# Altium PCB PCB1.PcbDoc
Units mil, origin at the board's own origin, x right, y up, seen from the top; angles counter-clockwise.
Board outline 6000 x 4000 mil, 2 copper layers (Top Layer, Bottom Layer); 74 components, 108 nets, 466 pads, 146 vias.
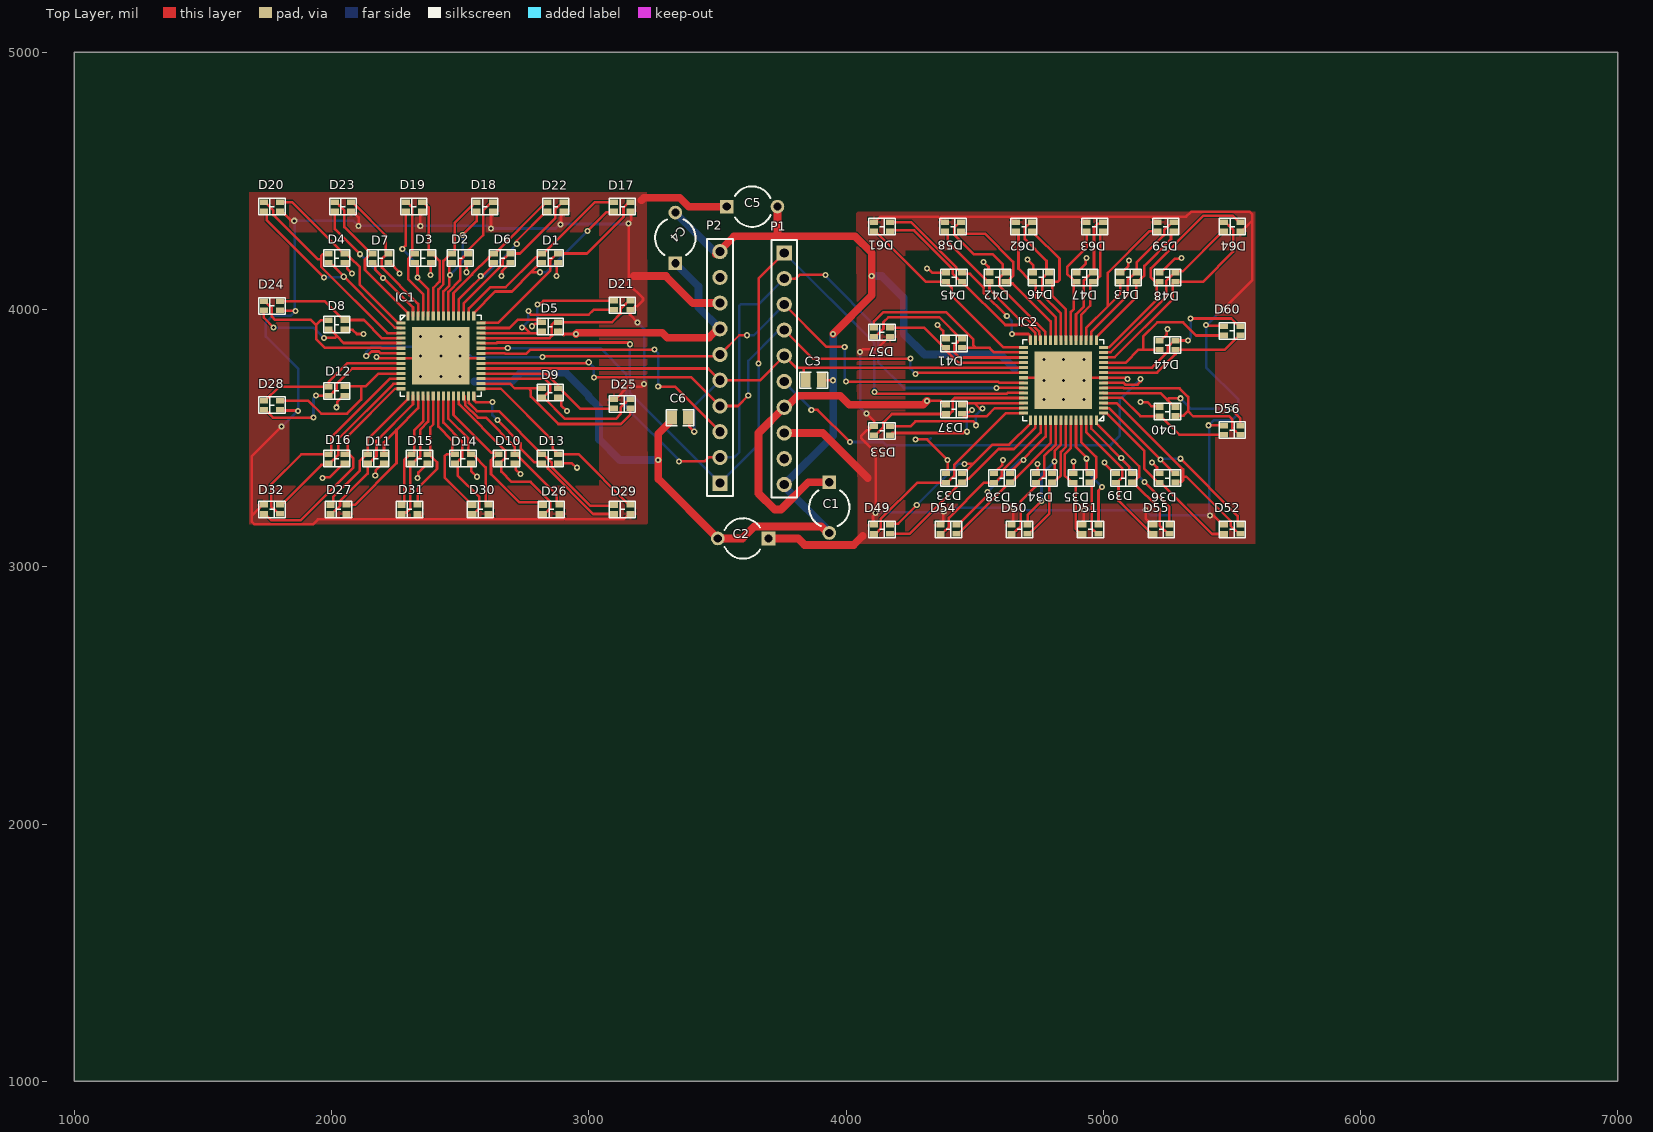
[diagram p0: Top Layer view]
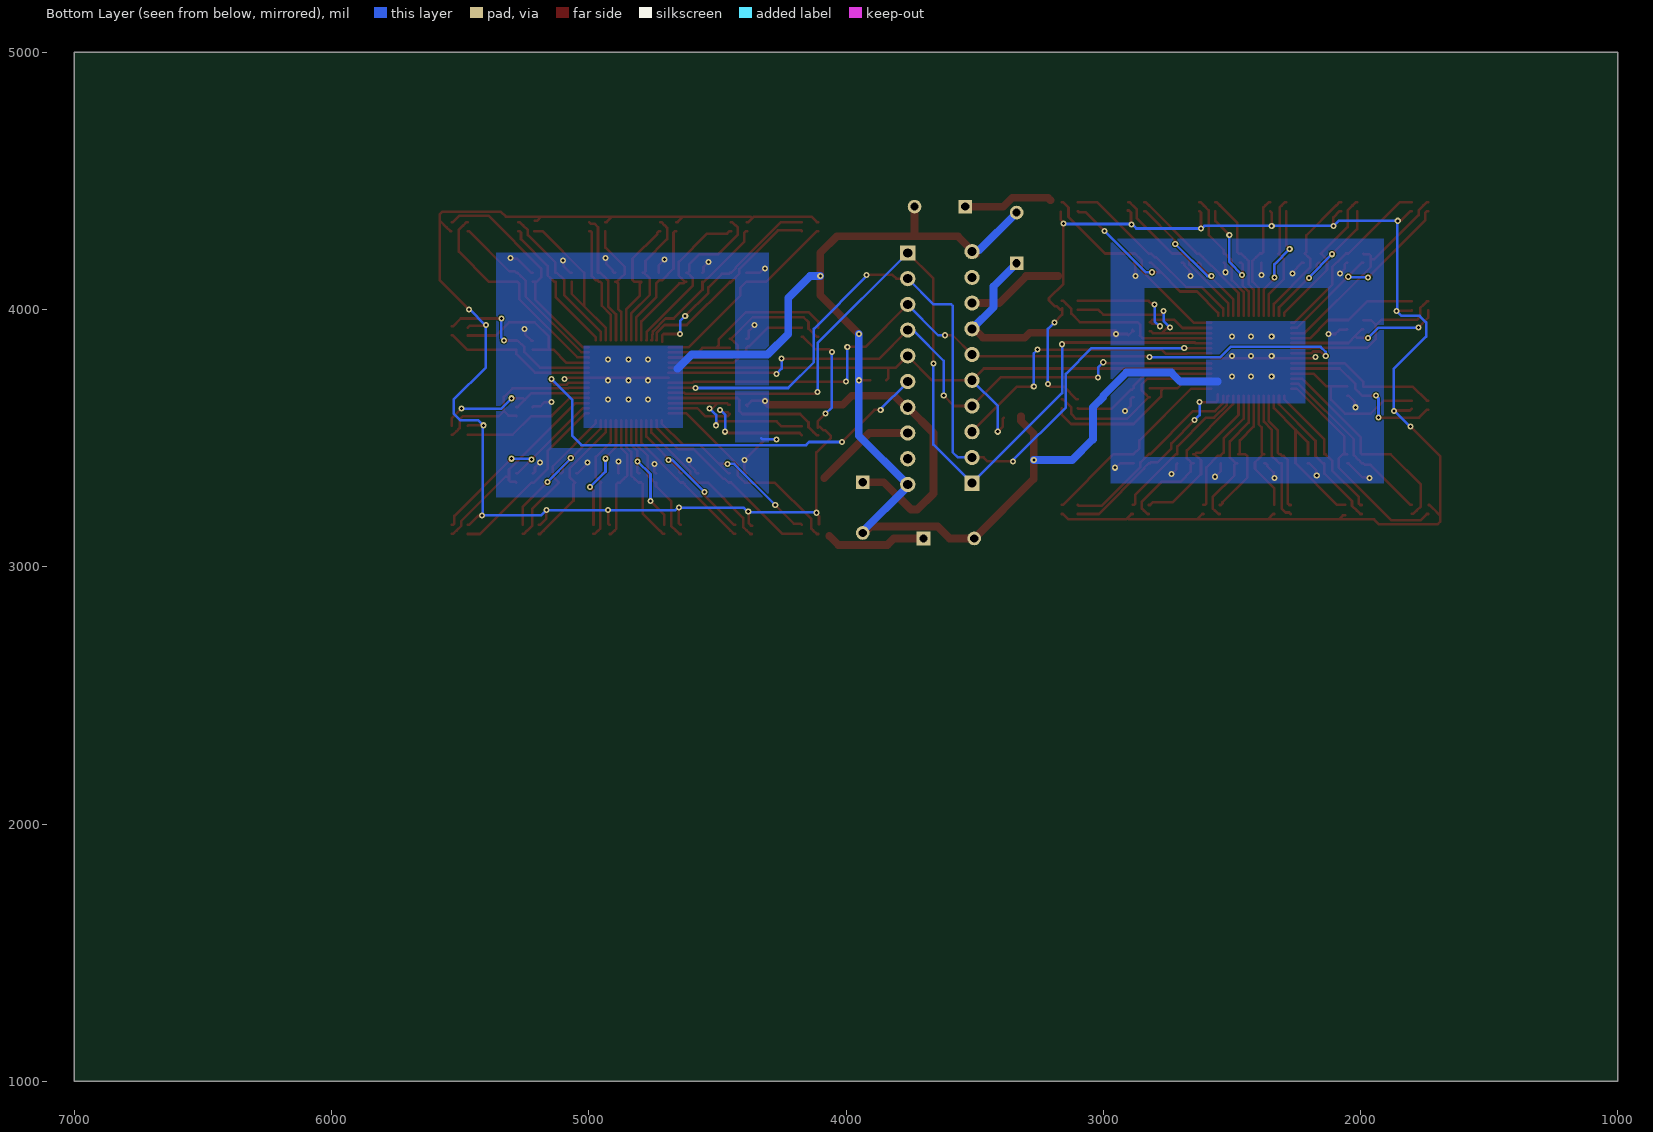
[diagram p1: Bottom Layer view, seen from below]

## Layer stack, top to bottom
Top Solder: solder mask 0.4, Solder Resist, Dk 3.5
Top Layer: signal copper 1.4
Dielectric 1: dielectric 12.6, FR-4, Dk 4.8
Bottom Layer: signal copper 1.4
Bottom Solder: solder mask 0.4, Solder Resist, Dk 3.5

## Board outline
1000,1000 7000,1000 7000,5000 1000,5000

## Design rules (kind name [scope] priority, off if disabled: settings)
Clearance [All] p1: gap=5 ignorepadtopadclearanceinfootprint=FALSE except(0: Arc-Text Track-Text SMDPad-Text THPad-Text Via-Text Fill-Text Poly-Text Region-Text Text-Text)
MinimumSolderMaskSliver [All] p1: minsoldermaskwidth=0
PolygonConnect [All] p1: thpad.connectstyle=Relief thpad.reliefconductorwidth=10 thpad.reliefentries=4 thpad.polygonreliefangle="90 Angle" thpad.airgapwidth=10 smdpad.connectstyle=Relief smdpad.reliefconductorwidth=10 smdpad.reliefentries=4 smdpad.polygonreliefangle="90 Angle" smdpad.airgapwidth=10 via.connectstyle=Direct via.reliefconductorwidth=10 via.reliefentries=4 via.polygonreliefangle="90 Angle" via.airgapwidth=10
RoutingVias [All] p1: holewidth=11.81 width=23.62 viastyle="Through Hole" minholewidth=11.81 minwidth=23.62 maxholewidth=11.81 maxwidth=23.62
SilkToSilkClearance [All] p1: silktosilkclearance=0
SilkToSolderMaskClearance [IsPad] p1: minsilkscreentomaskgap=0 clearancetoexposedcopper=TRUE
SolderMaskExpansion [All] p1: expansion=4
UnConnectedPin UnConnectedPin_1 [InNet('+VIN_2')] p1:
UnConnectedPin [InNet('+VIN_1')] p2:
Width [All] p1: maxlimit=50 minlimit=10 preferedwidth=10
27 further rules are at their usual default settings.

## Classes and differential pairs
component class Sheet1: C1 C3 D33 D34 D35 D36 D37 D38 D39 D40 D41 D42 D43 D44 D45 D46 D47 D48 D49 D50 D51 D52 D53 D54 D55 D56 D57 D58 D59 D60 D61 D62 D63 D64 IC2 P1
component class TLC5955: C6 D1 D2 D3 D4 D5 D6 D7 D8 D9 D10 D11 D12 D13 D14 D15 D16 D17 D18 D19 D20 D21 D22 D23 D24 D25 D26 D27 D28 D29 D30 D31 D32 IC1 P2

## Components (designator, comment, footprint, x,y, rotation, side; value= is the part's Value field where it differs from the comment)
C1 "Cap2" CAPR5-4X5 3935,3230 r270 top value=100pF
C2 "Cap2" CAPR5-4X5 3600,3110 r180 top value=100pF
C3 "0805 Capacitor" "0805 Capacitor" 3875,3725 r180 top
C4 "Cap2" CAPR5-4X5 3336.46,4278.54 r90 top value=100pF
C5 "Cap2" CAPR5-4X5 3635,4400 r0 top value=100pF
C6 "0805 Capacitor" "0805 Capacitor" 3355,3580 r0 top
D1 "RGB 0603 LED" "RGB LED" 2850,4200 r0 top
D2 "RGB 0603 LED" "RGB LED" 2500,4200 r0 top
D3 "RGB 0603 LED" "RGB LED" 2355,4200 r0 top
D4 "RGB 0603 LED" "RGB LED" 2020,4200 r0 top
D5 "RGB 0603 LED" "RGB LED" 2850,3933.33 r0 top
D6 "RGB 0603 LED" "RGB LED" 2663.5,4200 r0 top
D7 "RGB 0603 LED" "RGB LED" 2190,4200 r0 top
D8 "RGB 0603 LED" "RGB LED" 2020,3941.67 r0 top
D9 "RGB 0603 LED" "RGB LED" 2850,3676.67 r0 top
D10 "RGB 0603 LED" "RGB LED" 2680.6,3420 r0 top
D11 "RGB 0603 LED" "RGB LED" 2172.4,3420 r0 top
D12 "RGB 0603 LED" "RGB LED" 2020,3683.33 r0 top
D13 "RGB 0603 LED" "RGB LED" 2850,3420 r0 top
D14 "RGB 0603 LED" "RGB LED" 2511.2,3420 r0 top
D15 "RGB 0603 LED" "RGB LED" 2341.8,3420 r0 top
D16 "RGB 0603 LED" "RGB LED" 2020,3420 r0 top
D17 "RGB 0603 LED" "RGB LED" 3130,4400 r0 top
D18 "RGB 0603 LED" "RGB LED" 2595.6,4400 r0 top
D19 "RGB 0603 LED" "RGB LED" 2319.9,4400 r0 top
D20 "RGB 0603 LED" "RGB LED" 1768.5,4400 r0 top
D21 "RGB 0603 LED" "RGB LED" 3130,4016.67 r0 top
D22 "RGB 0603 LED" "RGB LED" 2871.3,4400 r0 top
D23 "RGB 0603 LED" "RGB LED" 2044.2,4400 r0 top
D24 "RGB 0603 LED" "RGB LED" 1768.5,4014.09 r0 top
D25 "RGB 0603 LED" "RGB LED" 3130,3633.33 r180 top
D26 "RGB 0603 LED" "RGB LED" 2854.3,3222.72 r0 top
D27 "RGB 0603 LED" "RGB LED" 2027.2,3222.72 r0 top
D28 "RGB 0603 LED" "RGB LED" 1768.5,3628.19 r0 top
D29 "RGB 0603 LED" "RGB LED" 3130,3222.72 r0 top
D30 "RGB 0603 LED" "RGB LED" 2578.6,3222.72 r0 top
D31 "RGB 0603 LED" "RGB LED" 2302.9,3222.72 r0 top
D32 "RGB 0603 LED" "RGB LED" 1768.5,3222.72 r180 top
D33 "RGB 0603 LED" "RGB LED" 4420,3345 r180 top
D34 "RGB 0603 LED" "RGB LED" 4770,3345 r180 top
D35 "RGB 0603 LED" "RGB LED" 4915,3345 r180 top
D36 "RGB 0603 LED" "RGB LED" 5250,3345 r180 top
D37 "RGB 0603 LED" "RGB LED" 4420,3611.67 r180 top
D38 "RGB 0603 LED" "RGB LED" 4606.5,3345 r180 top
D39 "RGB 0603 LED" "RGB LED" 5080,3345 r180 top
D40 "RGB 0603 LED" "RGB LED" 5250,3603.33 r180 top
D41 "RGB 0603 LED" "RGB LED" 4420,3868.33 r180 top
D42 "RGB 0603 LED" "RGB LED" 4589.4,4125 r180 top
D43 "RGB 0603 LED" "RGB LED" 5097.6,4125 r180 top
D44 "RGB 0603 LED" "RGB LED" 5250,3861.67 r180 top
D45 "RGB 0603 LED" "RGB LED" 4420,4125 r180 top
D46 "RGB 0603 LED" "RGB LED" 4758.8,4125 r180 top
D47 "RGB 0603 LED" "RGB LED" 4928.2,4125 r180 top
D48 "RGB 0603 LED" "RGB LED" 5250,4125 r180 top
D49 "RGB 0603 LED" "RGB LED" 4140,3145 r180 top
D50 "RGB 0603 LED" "RGB LED" 4674.4,3145 r180 top
D51 "RGB 0603 LED" "RGB LED" 4950.1,3145 r180 top
D52 "RGB 0603 LED" "RGB LED" 5501.5,3145 r180 top
D53 "RGB 0603 LED" "RGB LED" 4140,3528.33 r180 top
D54 "RGB 0603 LED" "RGB LED" 4398.7,3145 r180 top
D55 "RGB 0603 LED" "RGB LED" 5225.8,3145 r180 top
D56 "RGB 0603 LED" "RGB LED" 5501.5,3530.91 r180 top
D57 "RGB 0603 LED" "RGB LED" 4140,3911.67 r0 top
D58 "RGB 0603 LED" "RGB LED" 4415.7,4322.28 r180 top
D59 "RGB 0603 LED" "RGB LED" 5242.8,4322.28 r180 top
D60 "RGB 0603 LED" "RGB LED" 5501.5,3916.81 r180 top
D61 "RGB 0603 LED" "RGB LED" 4140,4322.28 r180 top
D62 "RGB 0603 LED" "RGB LED" 4691.4,4322.28 r180 top
D63 "RGB 0603 LED" "RGB LED" 4967.1,4322.28 r180 top
D64 "RGB 0603 LED" "RGB LED" 5501.5,4322.28 r0 top
IC1 "TLC5955" TLC5955 2425,3820 r0 top
IC2 "TLC5955" TLC5955 4845,3725 r180 top
P1 "Header 10" HDR1X10 3760,4220 r270 top
P2 "Header 10" HDR1X10 3510,3325 r90 top

## Footprints (in the part's own frame and the unit in brackets; to place one, negate y for a bottom-side part, rotate by r counter-clockwise, add the part's x,y. Pads: shape width x height; smd on the part's side, far side on the other; paste and mask are expansions set on the pad)
"0805 Capacitor" [mm]
  rect 0.96x1.39 smd: 1(-0.79,0) 2(0.79,0)
  silkscreen extent -1.37,-0.79 1.37,0.79, body extent -1,-0.63 1,0.63, height 1.35
CAPR5-4X5 [mm] "Capacitor; 2 Leads"
  rect 1.35x1.35 hole 0.8: 1(-2.5,0)
  round 1.35 hole 0.8: 2(2.5,0)
  silkscreen extent -1.69,-2 1.82,2
HDR1X10 [mm] "Connector; Header; 10 Position"
  rect 1.5x1.5 hole 0.9: 1(0,0)
  round 1.5 hole 0.9: 2(2.54,0) 3(5.08,0) 4(7.62,0) 5(10.16,0) 6(12.7,0) 7(15.24,0) 8(17.78,0) 9(20.32,0) 10(22.86,0)
  silkscreen extent -1.27,-1.27 24.13,1.27
"RGB LED" [mm]
  rect 0.8x0.55 smd: 1(-0.8,-0.45) 2(-0.8,0.439) 3(0.8,0.45) 4(0.8,-0.45)
  round 0.381 on Top Overlay: ""(1.6,-0.66)
  silkscreen extent -1.3,-0.81 1.3,0.81
TLC5955 [mm]
  rect 0.9x0.3 smd: 1(-3.95,3.25) 2(-3.95,2.75) 3(-3.95,2.25) 4(-3.95,1.75) 5(-3.95,1.25) 6(-3.95,0.75) 7(-3.95,0.25) 8(-3.95,-0.25) 9(-3.95,-0.75) 10(-3.95,-1.25) 11(-3.95,-1.75) 12(-3.95,-2.25) 13(-3.95,-2.75) 14(-3.95,-3.25) 29(3.95,-3.25) 30(3.95,-2.75) 31(3.95,-2.25) 32(3.95,-1.75) 33(3.95,-1.25) 34(3.95,-0.75) 35(3.95,-0.25) 36(3.95,0.25) 37(3.95,0.75) 38(3.95,1.25) 39(3.95,1.75) 40(3.95,2.25) 41(3.95,2.75) 42(3.95,3.25)
  rect 0.3x0.9 smd: 15(-3.25,-3.95) 16(-2.75,-3.95) 17(-2.25,-3.95) 18(-1.75,-3.95) 19(-1.25,-3.95) 20(-0.75,-3.95) 21(-0.25,-3.95) 22(0.25,-3.95) 23(0.75,-3.95) 24(1.25,-3.95) 25(1.75,-3.95) 26(2.25,-3.95) 27(2.75,-3.95) 28(3.25,-3.95) 43(3.25,3.95) 44(2.75,3.95) 45(2.25,3.95) 46(1.75,3.95) 47(1.25,3.95) 48(0.75,3.95) 49(0.25,3.95) 50(-0.25,3.95) 51(-0.75,3.95) 52(-1.25,3.95) 53(-1.75,3.95) 54(-2.25,3.95) 55(-2.75,3.95) 56(-3.25,3.95)
  rect 5.7x5.7 smd: 57(0,0)
  silkscreen extent -4,-4 4,4, body extent -4.05,-4.05 4.05,4.05, height 1

## Part data
C1 C2 C4 C5: "Capacitor", PackageDescription="Capacitor; 2 Leads", PackageReference=CAPR5-4X5, Published=23-Sep-2002, Publisher="Altium Limited"
P1 P2: "Header, 10-Pin", LatestRevisionDate=17-Jul-2002, LatestRevisionNote="Re-released for DXP Platform.", Publisher="Altium Limited"

## Via types
v1: diameter 23.62, hole 11.81, Top Layer to Bottom Layer, tented both sides, 128 vias
v2: diameter 23.62, hole 11.81, Top Layer to Bottom Layer, 18 vias

## Nets (pads, with @x,y where several pads share a name; then routed paths per layer and width w, separated by ;. In a path a pad name is that pad's centre, name@x,y a point inside that pad or via, vN(x,y) a via of type N, cw(c..) or ccw(c..) an arc to the next point about the centre after c; other vN are vias at no path point)
+VIN_1: C4.1 D1.4 D2.4 D3.4 D4.4 D5.4 D6.4 D7.4 D8.4 D9.4 D10.4 D11.4 D12.4 D13.4 D14.4 D15.4 D16.4 P2.7 | length 2002.9
  Top Layer w10: v1(1965,3345) 1967.52,3347.52 1991.81,3347.52 2046.57,3402.28 D16.4 ; v1(2020,3620) 2022.61,3622.61 2022.61,3641.65 2046.57,3665.62 D12.4 ; D8.4 2054.5,3920.94 2082.24,3920.94 2098.19,3905 v1(2125,3905) ; D4.4 2055.22,4182.28 2061.04,4176.46 2061.04,4158.96 v1(2080,4140) ; v1(2170,3355) 2172.61,3357.61 2172.61,3375.92 2198.97,3402.28 D11.4 ; D7.4 2226.42,4182.28 2262.39,4146.31 2262.39,4142.61 v1(2265,4140) ; v1(2335,3345) 2337.61,3347.61 2337.61,3366.59 2362.55,3391.54 2362.55,3396.46 2368.37,3402.28 D15.4 ; v1(2385,4135) 2385,4180.79 D3.4 ; v1(2525,4145) 2525,4176.46 2530.83,4182.28 D2.4 ; D14.4 2542.7,3372.3 v1(2565,3350) ; v1(2660,4130) 2662.61,4132.61 2662.61,4149.89 2684.25,4171.54 2684.25,4176.46 2690.08,4182.28 D6.4 ; D10.4 2716.04,3398.34 2716.04,3378.96 v1(2735,3360) ; v1(2875,4130) 2875,4176.46 2880.83,4182.28 D1.4 ; D13.4 2934.37,3402.28 2951.65,3385 v1(2955,3385) ; D9.4 2886.42,3658.95 2892.24,3653.12 2892.24,3627.76 v1(2915,3605) ; D5.4@2886.19,3920.31 D5.4 2886.42,3915.62 2902.03,3900 2907.03,3905 v1(2950,3905) ; P2.7@3505.31,3920.31 P2.7
  Top Layer w30: v1(2950,3905) 2955,3910 3285,3910 3305,3890 3467.14,3890 3502.14,3925 P2.7
  Bottom Layer w30: C4.1 3426.24,4090.33 3426.24,4008.76 P2.7 P2.7@3510,3915
+VIN_1_1: C1.1 D33.4 D34.4 D35.4 D36.4 D37.4 D38.4 D39.4 D40.4 D41.4 D42.4 D43.4 D44.4 D45.4 D46.4 D47.4 D48.4 P1.7 | length 2625.3
  Top Layer w10: v1(4270,3495) 4315,3495 v1(4395,3415) 4395,3368.54 4389.17,3362.72 D33.4 ; v1(4315,3645) 4367.97,3645 4383.58,3629.38 D37.4 D37.4@4383.81,3624.69 ; v1(4315,4160) 4318.35,4160 4335.63,4142.72 D45.4 ; v1(4355,3940) 4377.76,3917.24 4377.76,3891.88 4383.58,3886.05 D41.4 ; v1(4535,4185) 4553.96,4166.04 4553.96,4146.66 D42.4 ; D38.4 4579.92,3362.72 4585.75,3368.54 4585.75,3373.46 4607.39,3395.11 4607.39,3412.39 v1(4610,3415) ; v1(4705,4195) 4727.3,4172.7 D46.4 ; D34.4 4739.17,3362.72 4745,3368.54 v1(4745,3400) ; D35.4 4885,3364.21 v1(4885,3410) ; D47.4 4901.63,4142.72 4907.45,4148.54 4907.45,4153.46 4932.39,4178.41 4932.39,4197.39 v1(4935,4200) ; v1(5005,3405) 5007.61,3402.39 5007.61,3398.69 5043.58,3362.72 D39.4 ; D43.4 5071.03,4142.72 5097.39,4169.08 5097.39,4187.39 v1(5100,4190) ; v1(5145,3640) 5171.81,3640 5187.76,3624.06 5215.5,3624.06 D40.4@5218.5,3621.05 ; v1(5190,3405) 5208.96,3386.04 5208.96,3368.54 5214.78,3362.72 D36.4 ; D44.4 5223.43,3879.38 5247.39,3903.35 5247.39,3922.39 v1(5250,3925) ; D48.4 5223.43,4142.72 5278.19,4197.48 5302.48,4197.48 v1(5305,4200)
  Top Layer w30: P1.7@3765,3630 3765,3625 P1.7 ; C1.1 3853.43,3328.43 3747.43,3222.43 3722.57,3222.43 3660,3285 3660,3520 P1.7 ; v1(4315,3645) 4300,3630 4012.5,3630 3977.5,3665 3812.86,3665 3767.86,3620 P1.7
  Bottom Layer w10: v1(4270,3495) 4325,3495 4330,3500
+VIN_2: C5.1 D17.4 D18.4 D19.4 D20.4 D21.4 D22.4 D23.4 D24.4 D25.4 D26.4 D27.4 D28.4 D29.4 D30.4 D31.4 D32.4 P2.8 | length 6483.1
  Top Layer w10: 1693.15,3201.85 1717.12,3225.83 1717.48,3225.83 1731.65,3240 D32.4@1735,3240 ; D28.4@1800,3615 1807.39,3607.61 1867.39,3607.61 v1(1870,3605) ; D24.4 1801.38,3995 v1(1860,3995) ; D20.4 1804.92,4382.28 1839.6,4347.61 1852.39,4347.61 v1(1855,4345) ; v1(1805,3545) 1690,3430 1690,3175 1700,3165 1928.27,3165 1947.44,3184.17 2084.45,3184.17 ; D27.4@2060,3200 2068.62,3200 2084.45,3184.17 ; D23.4 2080.62,4382.28 2105,4357.9 v1(2105,4325) ; D31.4 2339.32,3205 2360.15,3184.17 ; v1(2345,4325) 2345,4376.46 2350.83,4382.28 D19.4 ; D30.4 2615.02,3205 2635.85,3184.17 ; v1(2620,4315) 2620,4376.46 2625.83,4382.28 D18.4 ; D26.4@2885,3205 2890.72,3205 2905.36,3190.36 ; v1(2890,4330) 2892.05,4332.05 2892.05,4376.46 2900.59,4385 D22.4@2905,4385 ; D25.4 3103.43,3651.05 3152.37,3700 3205,3700 v1(3215,3710) ; D21.4@3160,4005 3160,3980 v1(3190,3950) ; D29.4 3156.57,3205 3135.75,3184.17 2911.54,3184.17 2905.36,3190.36 ; D21.4@3161.5,4000 3167.47,4000 3181.02,4013.56 3188.56,4013.56 3210.86,4035.86 3210.86,4044.14 3155,4100 v1(3155,4335) 3155,4338.69 3165,4348.69 D17.4@3165,4380 ; 2084.45,3184.17 2360.15,3184.17 ; 2360.15,3184.17 2635.85,3184.17 ; 2635.85,3184.17 2899.17,3184.17 2905.36,3190.36
  Top Layer w30: 3175,4130 3300,4130 3405,4025 P2.8 ; 3205,4425 3215,4435 3353.29,4435 3388.29,4400 C5.1
  Bottom Layer w10: v1(1805,3545) 1807.5,3545 1867.5,3605 v1(1870,3605) 1870,3770 1745,3895 1745,3950 1770,3975 1840,3975 v1(1860,3995) 1857.5,3997.5 1857.5,4338.71 1856.21,4340 v1@1855,4340 ; v1(1855,4345) 2085,4345 v1(2105,4325) v1(2345,4325) 2606.31,4325 2616.31,4315 v1(2620,4315) 2871.31,4315 2886.31,4330 v1(2890,4330) 2892.5,4332.5 3152.5,4332.5 v1(3155,4335) ; v1(3190,3950) 3215,3925 v1(3215,3710)
+VIN_2_1: C2.1 D49.4 D50.4 D51.4 D52.4 D53.4 D54.4 D55.4 D56.4 D57.4 D58.4 D59.4 D60.4 D61.4 D62.4 D63.4 D64.4 P1.8 | length 6543.3
  Top Layer w10: v1(4055,3835) 4065,3845 4117.63,3845 4166.57,3893.95 D57.4@4171.5,3893.95 ; v1(4080,3595) 4110,3565 D53.4@4110,3540 ; D49.4@4105,3165 4105,3196.31 4115,3206.31 v1(4115,3210) 4115,3445 4059.14,3500.86 4059.14,3509.14 4081.44,3531.44 4088.98,3531.44 4102.53,3545 D53.4@4108.5,3545 ; D61.4 4113.43,4340 4134.25,4360.83 4358.46,4360.83 4364.64,4354.64 ; D54.4@4365,3160 4369.41,3160 4377.95,3168.54 4377.95,3212.95 v1(4380,3215) ; D58.4@4385,4340 4379.28,4340 4364.64,4354.64 ; D50.4 4644.17,3162.72 4650,3168.54 v1(4650,3230) ; D62.4 4654.98,4340 4634.15,4360.83 ; D51.4 4919.17,3162.72 4925,3168.54 v1(4925,3220) ; D63.4 4930.68,4340 4909.85,4360.83 ; v1(5165,3220) 5165,3187.1 5189.38,3162.72 D55.4 ; D59.4@5210,4345 5201.38,4345 5185.55,4360.83 ; v1(5400,3940) 5402.61,3937.39 5462.61,3937.39 D60.4@5470,3930 ; v1(5410,3550) 5468.62,3550 D56.4 ; v1(5415,3200) 5417.61,3197.39 5430.4,3197.39 5465.08,3162.72 D52.4 ; v1(5465,4000) 5580,4115 5580,4370 5570,4380 5341.73,4380 5322.56,4360.83 5185.55,4360.83 ; D64.4@5535,4305 5538.35,4305 5552.52,4319.17 5552.88,4319.17 5576.85,4343.15 ; 4364.64,4354.64 4370.83,4360.83 4634.15,4360.83 ; 4634.15,4360.83 4909.85,4360.83 ; 4909.85,4360.83 5185.55,4360.83
  Top Layer w30: C2.1 3813.86,3110 3838.86,3085 4030,3085 4065,3120 ; P1.8 3910,3520 4085,3345
  Bottom Layer w10: v1(4055,3835) 4055,3620 v1(4080,3595) ; v1(4115,3210) 4117.5,3212.5 4377.5,3212.5 v1(4380,3215) 4383.69,3215 4398.69,3230 v1(4650,3230) 4653.69,3230 4663.69,3220 v1(4925,3220) v1(5165,3220) 5185,3200 v1(5415,3200) ; v1@5415,3205 5413.79,3205 5412.5,3206.29 5412.5,3547.5 v1(5410,3550) 5430,3570 5500,3570 5525,3595 5525,3650 5400,3775 v1(5400,3940) 5402.5,3940 5462.5,4000 v1(5465,4000)
Error_Read: IC2.7 P1.6 | length 1833.7
  Top Layer w10: v1(3865,3610) 3890,3610 v1(4015,3485) ; IC2.7 5079,3715.16 5085.97,3708.19 5133.19,3708.19 5145,3720 v1(5145,3730)
  Bottom Layer w10: P1.6@3765,3715 3765,3712.5 3865,3612.5 v1(3865,3610) ; v1(4015,3485) 4142.95,3485 4154.77,3473.19 5028.19,3473.19 5065,3510 5065,3650 v1(5145,3730)
GND: C1.2 C2.2 C3.1 C4.2 C5.2 C6.1 IC1.8 IC1.35 IC1.57 IC2.8 IC2.35 IC2.57 P1.10 P2.10 | length 5987.3
  Top Layer w10: v1(2175,3815) 2178.69,3815 2183.53,3810.16 IC1.8 2415.16,3810.16 v2(2425,3820) 2434.84,3810.16 IC1.35 ; 3725,4275 3733.43,4283.43 3733.43,4285 ; C3.1 v1(3950,3725) ; IC2.35 4835.16,3734.84 v2(4845,3725) 4854.84,3734.84 5086.47,3734.84 5091.31,3730 v1(5095,3730)
  Top Layer w30: C6.1@3320,3585 3320,3567.64 3270,3517.64 v1(3270,3415) 3270,3341.57 C2.2 3597.27,3110 3643.85,3156.57 3903.74,3156.57 3930,3130.31 C1.2@3930,3130 ; P2.10@3495,4215 3565,4285 3733.43,4285 ; C5.2 3733.43,4285 ; v1(3950,3905) 4100,4055 v1(4100,4130) 4100,4220 4035,4285 3733.43,4285
  Bottom Layer w30: 2555,3720 2700,3720 2735,3755 2910,3755 3000,3665 3000,3660 3040,3620 3040,3495 3120,3415 v1(3270,3415) ; C4.2 3482.87,4230.56 3496.58,4230.56 3505,4222.14 P2.10@3505,4215 ; P1.10 3950,3510 v1(3950,3725) v1(3950,3905) ; P1.10@3765,3320 3765,3307.84 3935,3137.84 C1.2 ; v1(4100,4130) 4140,4130 4225,4045 4225,3905 4305,3825 4600,3825 4655,3770
  other v2: 4770,3650 4845,3650 4925,3650 4770,3725 4925,3725 2345,3740 2425,3740 2500,3740 4770,3805 4845,3805 4925,3805 2345,3820 2500,3820 2345,3895 2425,3895 2500,3895
GSCLK: IC1.34 IC2.34 P1.4 P2.4 | length 2511.1
  Top Layer w10: IC1.34@2580,3790 IC1.34 ; IC1.34 2991.79,3790.47 2996.31,3795 v1(3000,3795) ; v1(3020,3735) 3021.81,3736.81 3398.19,3736.81 P2.4 3580,3625 v1(3620,3665) ; P1.4 3871.81,3808.19 4248.19,3808.19 v1(4250,3810) ; v1(4270,3750) 4273.69,3750 4278.21,3754.53 IC2.34 IC2.34@4690,3755
  Bottom Layer w10: v1(3000,3795) 3020,3775 v1(3020,3735) ; v1(3620,3665) 3620,3800 3734.57,3914.57 3759.57,3914.57 P1.4@3765,3920 ; v1(4250,3810) 4250,3770 v1(4270,3750)
LAT: IC1.38 IC2.38 P1.1 P2.1 | length 3529
  Top Layer w10: IC1.38 2641.88,3869.21 2644.48,3871.81 3149.5,3871.81 ; v1(3660,3790) 3660,4120 P1.1 ; v1(4110,3680) 4113.69,3680 4120.5,3673.19 4625.52,3673.19 4628.12,3675.79 IC2.38
  Bottom Layer w10: v1(3160,3865) 3160,3675 P2.1 ; P2.1@3505,3320 P2.1 ; v1(3660,3790) 3660,3475 P2.1 ; P1.1 4110,3870 v1(4110,3680)
OUTB0: D1.3 D17.3 IC1.42 | length 821.3
  Top Layer w10: IC1.42 2647.95,3947.95 2850,4150 2850,4191.51 2861.61,4203.11 2861.97,4203.11 2876.57,4217.72 D1.3 2992.72,4217.72 3135,4360 3135,4396.51 3142.07,4403.58 3142.43,4403.58 3156.57,4417.72 D17.3
OUTB0_1: D33.3 D49.3 IC2.42 | length 821.3
  Top Layer w10: D49.3 4113.43,3127.28 4127.57,3141.42 4127.93,3141.42 4135,3148.49 4135,3185 4277.28,3327.28 D33.3 4393.43,3327.28 4408.03,3341.89 4408.39,3341.89 4420,3353.49 4420,3395 4622.05,3597.05 IC2.42
OUTB1: D2.3 D18.3 IC1.48 | length 519.9
  Top Layer w10: IC1.48 2454.53,4068.91 2500,4114.38 2500,4191.51 2512.82,4204.32 2513.18,4204.32 2526.57,4217.72 D2.3 2531.5,4231.5 2589.85,4289.85 2589.85,4385.76 2608.42,4404.32 2608.78,4404.32 2622.18,4417.72 D18.3
OUTB1_1: D34.3 D50.3 IC2.48 | length 519.9
  Top Layer w10: D50.3 4647.82,3127.28 4661.22,3140.68 4661.58,3140.68 4680.15,3159.24 4680.15,3255.15 4738.5,3313.5 D34.3 4743.43,3327.28 4756.82,3340.68 4757.18,3340.68 4770,3353.49 4770,3430.62 4815.47,3476.09 IC2.48
OUTB2: D3.3 D19.3 IC1.51 | length 489
  Top Layer w10: D19.3 2356.32,4417.72 2369.71,4404.32 2370.08,4404.32 2377.15,4397.25 2377.15,4223.54 2382.97,4217.72 D3.3 2391.42,4217.72 2404.81,4204.32 2405.17,4204.32 2420,4189.5 2420,4108.43 2395.47,4083.9 IC1.51
OUTB2_1: D35.3 D51.3 IC2.51 | length 489
  Top Layer w10: IC2.51 4874.53,3461.1 4850,3436.57 4850,3355.5 4864.83,3340.68 4865.19,3340.68 4878.58,3327.28 D35.3 4887.03,3327.28 4892.85,3321.46 4892.85,3147.75 4899.92,3140.68 4900.29,3140.68 4913.68,3127.28 D51.3
OUTB3: D4.3 D20.3 IC1.1 | length 704.4
  Top Layer w10: D20.3 1846.57,4417.72 2046.57,4217.72 D4.3 2056.42,4217.72 2071.02,4203.11 2071.39,4203.11 2110,4164.5 2110,4095.63 2257.68,3947.95 IC1.1
OUTB3_1: D36.3 D52.3 IC2.1 | length 704.4
  Top Layer w10: IC2.1 5012.32,3597.05 5160,3449.37 5160,3380.5 5198.61,3341.89 5198.98,3341.89 5213.58,3327.28 D36.3 5223.43,3327.28 5423.43,3127.28 D52.3
OUTB4: D5.3 D21.3 IC1.39 | length 679.1
  Top Layer w10: IC1.39 2848.04,3888.9 2857.77,3898.63 2855.75,3900.65 2855.75,3940 2866.8,3951.05 D5.3 3091.32,3951.05 3124.25,3983.98 3124.25,4002.42 3142.82,4020.99 3143.18,4020.99 3156.57,4034.38 D21.3
OUTB4_1: D37.3 D53.3 IC2.39 | length 679.1
  Top Layer w10: D53.3 4113.43,3510.62 4126.82,3524.01 4127.18,3524.01 4145.75,3542.58 4145.75,3561.02 4178.68,3593.95 D37.3 4403.2,3593.95 4414.25,3605 4414.25,3644.35 4412.23,3646.37 4421.96,3656.1 IC2.39
OUTB5: D6.3 D22.3 IC1.45 | length 631.7
  Top Layer w10: IC1.45 2513.58,4023.14 2665,4174.56 2665,4193 2675.11,4203.11 2675.47,4203.11 2690.08,4217.72 D6.3 2732.72,4217.72 2870,4355 2870,4390.2 2882.91,4403.11 2883.27,4403.11 2897.88,4417.72 D22.3
OUTB5_1: D38.3 D54.3 IC2.45 | length 631.7
  Top Layer w10: D54.3 4372.12,3127.28 4386.73,3141.89 4387.09,3141.89 4400,3154.8 4400,3190 4537.28,3327.28 D38.3 4579.92,3327.28 4594.53,3341.89 4594.89,3341.89 4605,3352 4605,3370.44 4756.42,3521.86 IC2.45
OUTB6: D7.3 D23.3 IC1.54 | length 570.8
  Top Layer w10: D23.3 2080.62,4417.72 2094.01,4404.32 2094.38,4404.32 2210.75,4287.95 2210.75,4223.54 2216.57,4217.72 2203.18,4204.32 2202.82,4204.32 2195.75,4197.25 2195.75,4162.62 2336.42,4021.95 IC1.54
OUTB6_1: D39.3 D55.3 IC2.54 | length 570.8
  Top Layer w10: IC2.54 4933.58,3523.05 5074.25,3382.38 5074.25,3347.75 5067.18,3340.68 5066.82,3340.68 5053.43,3327.28 5059.25,3321.46 5059.25,3257.05 5175.62,3140.68 5175.99,3140.68 5189.38,3127.28 D55.3
OUTB7: D8.3 D24.3 IC1.4 | length 529.4
  Top Layer w10: D24.3 1974.15,4031.81 2046.57,3959.38 D8.3 2125.62,3959.38 2197.01,3887.99 2268.58,3887.99 IC1.4
OUTB7_1: D40.3 D56.3 IC2.4 | length 529.4
  Top Layer w10: IC2.4 5001.42,3657.01 5072.99,3657.01 5144.38,3585.62 D40.3 5223.43,3585.62 5295.85,3513.19 D56.3
OUTB8: D9.3 D25.3 IC1.32 | length 580
  Top Layer w10: IC1.32 2833.9,3751.1 2881.5,3703.5 D9.3 2887.32,3688.56 2892.61,3688.56 2966.16,3615 3097.89,3615 D25.3
OUTB8_1: D41.3 D57.3 IC2.32 | length 580
  Top Layer w10: D57.3 4172.11,3930 4303.84,3930 4377.39,3856.44 4382.68,3856.44 D41.3 4388.5,3841.5 4436.1,3793.9 IC2.32
OUTB9: D10.3 D26.3 IC1.26 | length 603.6
  Top Layer w10: IC1.26 2514.49,3663.58 2516.42,3663.58 2517.36,3662.64 2517.36,3642.63 2519.17,3640.82 2519.17,3629.61 2568.79,3580 2600,3580 2712.1,3467.9 D10.3 2717.02,3437.72 2730.41,3424.32 2730.77,3424.32 2875.05,3280.05 2875.05,3246.26 2880.87,3240.43 D26.3
OUTB9_1: D42.3 D58.3 IC2.26 | length 603.6
  Top Layer w10: D58.3 4389.13,4304.57 4394.95,4298.74 4394.95,4264.95 4539.23,4120.68 4539.59,4120.68 4552.98,4107.28 D42.3 4557.9,4077.1 4670,3965 4701.21,3965 4750.83,3915.39 4750.83,3904.18 4752.64,3902.37 4752.64,3882.36 4753.58,3881.42 4755.51,3881.42 IC2.26
OUTB10: D11.3 D27.3 IC1.17 | length 672.6
  Top Layer w10: D27.3 2090.43,3240.43 2252.5,3402.5 2252.5,3532.5 ; D11.3 2203.9,3483.9 2252.5,3532.5 ; IC1.17 2336.42,3616.42 2252.5,3532.5
OUTB10_1: D43.3 D59.3 IC2.17 | length 672.6
  Top Layer w10: IC2.17 4933.58,3928.58 5017.5,4012.5 ; D43.3 5066.1,4061.1 5017.5,4012.5 ; D59.3 5179.57,4304.57 5017.5,4142.5 5017.5,4012.5
OUTB11: D12.3 D28.3 IC1.11 | length 648.6
  Top Layer w10: D28.3 1909.09,3645.91 1960,3595 2060,3595 2115,3650 2115,3701.05 ; D12.3 2115,3701.05 ; IC1.11 2182.07,3751.1 2132.02,3701.05 2115,3701.05
OUTB11_1: D44.3 D60.3 IC2.11 | length 648.6
  Top Layer w10: IC2.11 5087.93,3793.9 5137.98,3843.95 5155,3843.95 ; D44.3@5218.5,3843.95 5155,3843.95 ; D60.3 5360.91,3899.09 5310,3950 5210,3950 5155,3895 5155,3843.95
OUTB12: D13.3 D29.3 IC1.29 | length 786.1
  Top Layer w10: IC1.29 2657.95,3692.05 2859.25,3490.75 2859.25,3459.96 D13.3 2959.29,3437.72 3156.57,3240.43 D29.3
OUTB12_1: D45.3 D61.3 IC2.29 | length 786.1
  Top Layer w10: D61.3 4113.43,4304.57 4310.71,4107.28 D45.3 4410.75,4085.04 4410.75,4054.25 4612.05,3852.95 IC2.29
OUTB13: D14.3 D30.3 IC1.23 | length 497.4
  Top Layer w10: IC1.23 2454.53,3575.47 2531.95,3498.05 2531.95,3443.54 2543.6,3431.89 2553.81,3431.89 2599.35,3386.35 2599.35,3246.26 2605.18,3240.43 D30.3
OUTB13_1: D46.3 D62.3 IC2.23 | length 497.4
  Top Layer w10: D62.3 4664.82,4304.57 4670.65,4298.74 4670.65,4158.65 4716.19,4113.11 4726.4,4113.11 4738.05,4101.46 4738.05,4046.95 4815.47,3969.53 IC2.23
OUTB14: D15.3 D31.3 IC1.20 | length 480.8
  Top Layer w10: D31.3 2334.4,3304.4 2410,3380 2410,3406.3 2393.19,3423.11 2392.82,3423.11 D15.3@2378.22,3437.72 ; D15.3 D15.3@2378.22,3437.72 ; IC1.20 2395.47,3553.82 2384.04,3542.4 2384.04,3443.54 D15.3@2378.22,3437.72
OUTB14_1: D47.3 D63.3 IC2.20 | length 480.8
  Top Layer w10: IC2.20 4874.53,3991.18 4885.96,4002.6 4885.96,4101.46 D47.3@4891.78,4107.28 ; D47.3 D47.3@4891.78,4107.28 ; D63.3 4935.6,4240.6 4860,4165 4860,4138.7 4876.81,4121.89 4877.18,4121.89 D47.3@4891.78,4107.28
OUTB15: D16.3 D32.3 IC1.14 | length 874.8
  Top Layer w10: D32.3 1741.93,3205 1766.93,3180 1880,3180 2085,3385 2085,3420 2067.28,3437.72 D16.3@2056.42,3437.72 ; D16.3 D16.3@2056.42,3437.72 ; IC1.14 2247.05,3692.05 2062.24,3507.24 2062.24,3443.54 D16.3@2056.42,3437.72
OUTB15_1: D48.3 D64.3 IC2.14 | length 874.8
  Top Layer w10: IC2.14 5022.95,3852.95 5207.76,4037.76 5207.76,4101.46 D48.3@5213.58,4107.28 ; D48.3 D48.3@5213.58,4107.28 ; D64.3 5528.07,4340 5503.07,4365 5390,4365 5185,4160 5185,4125 5202.72,4107.28 D48.3@5213.58,4107.28
OUTG0: D1.2 D17.2 IC1.44 | length 764.5
  Top Layer w10: IC1.44 2534.17,3976.42 2534.17,4004.17 2617.25,4087.25 2677.25,4087.25 2793.11,4203.11 2799.41,4203.11 2813.58,4217.28 D1.2 2823.43,4217.28 3023.43,4417.28 D17.2
OUTG0_1: D33.2 D49.2 IC2.44 | length 764.5
  Top Layer w10: D49.2 4246.57,3127.72 4446.57,3327.72 D33.2 4456.42,3327.72 4470.59,3341.89 4476.89,3341.89 4592.75,3457.75 4652.75,3457.75 4735.83,3540.83 4735.83,3568.58 IC2.44
OUTG1: D2.2 D18.2 IC1.50 | length 513
  Top Layer w10: IC1.50 2415.16,4078.49 2435,4098.33 2435,4189.5 2449.83,4204.32 2450.62,4204.32 2463.58,4217.28 D2.2 2473.43,4217.28 2479.25,4223.11 2479.25,4338.15 2545.43,4404.32 2546.22,4404.32 2559.18,4417.28 D18.2
OUTG1_1: D34.2 D50.2 IC2.50 | length 513
  Top Layer w10: D50.2 4710.82,3127.72 4723.78,3140.68 4724.57,3140.68 4790.75,3206.85 4790.75,3321.89 4796.57,3327.72 D34.2 4806.42,3327.72 4819.38,3340.68 4820.17,3340.68 4835,3355.5 4835,3446.67 4854.84,3466.51 IC2.50
OUTG2: D3.2 D19.2 IC1.53 | length 490.9
  Top Layer w10: D19.2 2293.33,4417.28 2306.29,4404.32 2307.08,4404.32 2314.15,4397.25 2314.15,4221.71 2318.58,4217.28 2305.62,4204.32 2304.83,4204.32 2297.76,4197.25 2297.76,4117.94 2356.1,4059.59 IC1.53
OUTG2_1: D35.2 D51.2 IC2.53 | length 490.9
  Top Layer w10: IC2.53 4913.9,3485.41 4972.24,3427.06 4972.24,3347.75 4965.17,3340.68 4964.38,3340.68 4951.42,3327.72 4955.85,3323.29 4955.85,3147.75 4962.92,3140.68 4963.71,3140.68 4976.67,3127.72 D51.2
OUTG3: D4.2 D20.2 IC1.3 | length 816.9
  Top Layer w10: D20.2 1741.93,4417.28 1754.89,4404.32 1755.68,4404.32 1774.25,4385.76 1774.25,4367.32 1946.57,4195 1960,4195 ; D4.2 1986.22,4215 1965.86,4215 1960,4209.14 1960,4195 ; IC1.3 2217.63,3908.58 1960,4166.21 1960,4195
OUTG3_1: D36.2 D52.2 IC2.3 | length 816.9
  Top Layer w10: IC2.3 5052.37,3636.42 5310,3378.79 5310,3350 ; D36.2 5283.78,3330 5304.14,3330 5310,3335.86 5310,3350 ; D52.2 5528.07,3127.72 5515.11,3140.68 5514.31,3140.68 5495.75,3159.24 5495.75,3177.68 5323.43,3350 5310,3350
OUTG4: D5.2 D21.2 IC1.41 | length 702.4
  Top Layer w10: IC1.41 2691.78,3928.27 2723.51,3960 2809.12,3960 D5.2 ; v1(2780,3935) 2783.69,3935 2793.48,3944.79 2809.79,3944.79 D5.2@2815,3950 ; v1(2800,4020) 2800.86,4019.14 2809.14,4019.14 2823.95,4033.95 D21.2
  Bottom Layer w10: v1@2776.31,3930 v1@2780,3933.69 ; v1(2780,3935) v1@2780,3933.69 ; v1(2800,4020) 2800,3953.69 v1@2780,3933.69
OUTG4_1: D37.2 D53.2 IC2.41 | length 702.4
  Top Layer w10: D53.2 4180.45,3520 4455,3520 4460.86,3525.86 4469.14,3525.86 v1(4470,3525) ; D37.2 4460.88,3585 4546.49,3585 4578.22,3616.73 IC2.41 ; D37.2@4455,3595 4460.21,3600.21 4476.52,3600.21 4486.31,3610 v1(4490,3610)
  Bottom Layer w10: v1(4470,3525) 4470,3591.31 v1@4490,3611.31 ; v1(4490,3610) v1@4490,3611.31 ; v1@4493.69,3615 v1@4490,3611.31
OUTG5: D6.2 D22.2 IC1.47 | length 602.8
  Top Layer w10: IC1.47 2474.21,4063.37 2546.81,4135.97 2546.81,4137.8 2612.12,4203.11 2612.91,4203.11 2627.09,4217.28 2636.93,4217.28 2642.76,4223.11 2642.76,4225.95 2821.13,4404.32 2821.92,4404.32 2834.88,4417.28 D22.2
OUTG5_1: D38.2 D54.2 IC2.47 | length 602.8
  Top Layer w10: D54.2 4435.12,3127.72 4448.08,3140.68 4448.87,3140.68 4627.24,3319.05 4627.24,3321.89 4633.07,3327.72 4642.91,3327.72 4657.09,3341.89 4657.88,3341.89 4723.19,3407.2 4723.19,3409.03 4795.79,3481.63 IC2.47
OUTG6: D7.2 D23.2 IC1.56 | length 582.9
  Top Layer w10: D23.2 2017.63,4417.28 2030.59,4404.32 2031.38,4404.32 2049.95,4385.76 2049.95,4320.92 2153.58,4217.28 2140.62,4204.32 2139.83,4204.32 2130,4194.5 2130,4154.37 2297.05,3987.32 IC1.56
OUTG6_1: D39.2 D55.2 IC2.56 | length 582.9
  Top Layer w10: IC2.56 4972.95,3557.68 5140,3390.63 5140,3350.5 5130.17,3340.68 5129.38,3340.68 5116.42,3327.72 5220.05,3224.08 5220.05,3159.24 5238.62,3140.68 5239.41,3140.68 5252.37,3127.72 D55.2
OUTG7: D8.2 D24.2 IC1.6 | length 716.4
  Top Layer w10: D24.2 1741.93,4031.38 1754.89,4018.42 1755.68,4018.42 1767.84,4006.26 1767.84,3972.16 1780,3960 1920,3960 1940,3940 ; D8.2 1987.31,3957.76 1957.76,3957.76 1940,3940 ; IC1.6 2192.53,3849.53 2190.25,3851.81 1973.19,3851.81 1940,3885 1940,3940
OUTG7_1: D40.2 D56.2 IC2.6 | length 716.4
  Top Layer w10: IC2.6 5077.47,3695.47 5079.75,3693.19 5296.81,3693.19 5330,3660 5330,3605 ; D40.2@5281.5,3586.05 5282.69,3587.24 5312.24,3587.24 5330,3605 ; D56.2 5528.07,3513.62 5515.11,3526.58 5514.31,3526.58 5502.16,3538.74 5502.16,3572.84 5490,3585 5350,3585 5330,3605
OUTG8: D9.2 D25.2 IC1.30 | length 752
  Top Layer w10: IC1.30 2694.06,3711.73 2711.84,3693.95 2765.17,3693.95 ; D9.2 2765.17,3693.95 ; D25.2 3161.5,3591.5 3125,3555 2881.74,3555 2775,3661.74 2775,3684.12 2765.17,3693.95
OUTG8_1: D41.2 D57.2 IC2.30 | length 752
  Top Layer w10: D57.2@4108.5,3928.95 4108.5,3953.5 4145,3990 4388.26,3990 4495,3883.26 4495,3860.88 4504.83,3851.05 ; D41.2 4504.83,3851.05 ; IC2.30 4575.94,3833.27 4558.16,3851.05 4504.83,3851.05
OUTG9: D10.2 D26.2 IC1.24 | length 652.5
  Top Layer w10: IC1.24 2474.21,3590.79 2621.89,3443.11 2638.36,3443.11 D10.2@2644.18,3437.28 ; D10.2 D10.2@2644.18,3437.28 ; D26.2 2817.88,3240 2807.88,3250 2730,3250 2620,3360 2620,3413.9 2630.43,3424.32 2631.22,3424.32 D10.2@2644.18,3437.28
OUTG9_1: D42.2 D58.2 IC2.24 | length 652.5
  Top Layer w10: D58.2 4452.12,4305 4462.12,4295 4540,4295 4650,4185 4650,4131.1 4639.57,4120.68 4638.78,4120.68 D42.2@4625.82,4107.72 ; D42.2 D42.2@4625.82,4107.72 ; IC2.24 4795.79,3954.21 4648.11,4101.89 4631.64,4101.89 D42.2@4625.82,4107.72
OUTG10: D11.2 D27.2 IC1.15 | length 555.5
  Top Layer w10: D27.2 2000.63,3240 2006.46,3245.83 2006.46,3271.46 2110,3375 2110,3412.1 2121.01,3423.11 2121.81,3423.11 2135.98,3437.28 D11.2 2140.9,3496.53 2297.05,3652.68 IC1.15
OUTG10_1: D43.2 D59.2 IC2.15 | length 555.5
  Top Layer w10: IC2.15 4972.95,3892.32 5129.1,4048.47 D43.2 5134.02,4107.72 5148.19,4121.89 5148.99,4121.89 5160,4132.9 5160,4170 5263.54,4273.54 5263.54,4299.17 5269.37,4305 D59.2
OUTG11: D12.2 D28.2 IC1.9 | length 603
  Top Layer w10: D28.2 1741.93,3645.47 1797.07,3700.62 D12.2 1988.5,3718.5 2060.47,3790.47 IC1.9
OUTG11_1: D44.2 D60.2 IC2.9 | length 603
  Top Layer w10: IC2.9 5209.53,3754.53 5281.5,3826.5 D44.2 5472.93,3844.38 5528.07,3899.53 D60.2
OUTG12: D13.2 D29.2 IC1.27 | length 769.8
  Top Layer w10: IC1.27 2534.17,3663.58 2534.17,3635.83 2565,3605 2650.79,3605 D13.2 ; D13.2@2820,3440 2820.71,3440 2837.6,3423.11 2838.39,3423.11 2855.75,3405.76 2855.75,3387.32 3005.56,3237.5 3096,3237.5 D29.2
OUTG12_1: D45.2 D61.2 IC2.27 | length 769.8
  Top Layer w10: D61.2 4174,4307.5 4264.44,4307.5 4414.25,4157.68 4414.25,4139.24 4431.61,4121.89 4432.4,4121.89 4449.29,4105 D45.2@4450,4105 ; D45.2 4619.21,3940 4705,3940 4735.83,3909.17 4735.83,3881.42 IC2.27
OUTG13: D14.2 D30.2 IC1.21 | length 526.9
  Top Layer w10: IC1.21 2415.16,3544.84 2468.96,3491.04 2468.96,3443.11 2474.78,3437.28 2447.28,3437.28 2440,3430 2440,3347.11 2536.36,3250.75 2536.36,3245.83 2542.18,3240 D30.2
OUTG13_1: D46.2 D62.2 IC2.21 | length 526.9
  Top Layer w10: D62.2 4727.82,4305 4733.64,4299.17 4733.64,4294.25 4830,4197.89 4830,4115 4822.72,4107.72 4795.22,4107.72 4801.04,4101.89 4801.04,4053.96 4854.84,4000.16 IC2.21
OUTG14: D15.2 D31.2 IC1.18 | length 468.7
  Top Layer w10: D31.2 2276.33,3240 2282.15,3245.83 2282.15,3414.85 2298.76,3431.46 2304.48,3431.46 D15.2 2315.23,3437.28 2321.05,3443.11 2321.05,3530.37 2356.1,3565.42 IC1.18
OUTG14_1: D47.2 D63.2 IC2.18 | length 468.7
  Top Layer w10: IC2.18 4913.9,3979.58 4948.95,4014.63 4948.95,4101.89 4954.77,4107.72 D47.2 4965.52,4113.54 4971.24,4113.54 4987.85,4130.15 4987.85,4299.17 4993.67,4305 D63.2
OUTG15: D16.2 D32.2 IC1.12 | length 843.1
  Top Layer w10: D32.2 1795.08,3205.43 1782.12,3218.39 1781.32,3218.39 1765,3234.72 1765,3320 1882.28,3437.28 D16.2 1993.43,3437.28 1999.25,3443.11 1999.25,3504.25 2225.51,3730.51 2268.58,3730.51 IC1.12
OUTG15_1: D48.2 D64.2 IC2.12 | length 843.1
  Top Layer w10: IC2.12 5001.42,3814.49 5044.49,3814.49 5270.75,4040.75 5270.75,4101.89 5276.57,4107.72 D48.2 5387.72,4107.72 5505,4225 5505,4310.28 5488.68,4326.61 5487.88,4326.61 5474.92,4339.57 D64.2
OUTR0: D1.1 D17.1 IC1.43 | length 778.6
  Top Layer w10: IC1.43 2552.95,3987.32 2635.63,4070 2701.3,4070 2776.3,4145 ; v1(2810,4145) 2776.3,4145 ; D1.1 2813.58,4182.28 2776.3,4145 ; v1(2995,4305) 3067.76,4377.76 3093.98,4377.76 D17.1
  Bottom Layer w10: v1(2810,4145) 2835,4145 v1(2995,4305)
OUTR0_1: D33.1 D49.1 IC2.43 | length 778.6
  Top Layer w10: D49.1 4176.02,3167.24 4202.24,3167.24 v1(4275,3240) ; D33.1 4456.42,3362.72 4493.7,3400 ; v1(4460,3400) 4493.7,3400 ; IC2.43 4717.05,3557.68 4634.37,3475 4568.7,3475 4493.7,3400
  Bottom Layer w10: v1(4275,3240) 4435,3400 v1(4460,3400)
OUTR1: D2.1 D18.1 IC1.49 | length 514
  Top Layer w10: IC1.49 2434.84,4070.43 2457.76,4093.35 2457.76,4176.46 2463.58,4182.28 D2.1 ; v1(2510,4290) 2564.11,4344.11 D18.1
  Bottom Layer w10: v1(2460,4135) 2510,4185 v1(2510,4290)
OUTR1_1: D34.1 D50.1 IC2.49 | length 514
  Top Layer w10: D50.1 4705.89,3200.89 v1(4760,3255) ; D34.1 4806.42,3362.72 4812.24,3368.54 4812.24,3451.65 4835.16,3474.57 IC2.49
  Bottom Layer w10: v1(4760,3255) 4760,3360 v1(4810,3410)
OUTR2: D3.1 D19.1 IC1.52 | length 519
  Top Layer w10: v1(2275,4235) 2288.41,4248.41 D19.1 ; D3.1 2328.43,4182.28 2334.25,4176.46 2334.25,4120.75 2375.79,4079.21 IC1.52
  Bottom Layer w10: v1(2275,4235) 2335,4175 v1(2335,4125)
OUTR2_1: D35.1 D51.1 IC2.52 | length 519
  Top Layer w10: IC2.52 4894.21,3465.79 4935.75,3424.25 4935.75,3368.54 4941.57,3362.72 D35.1 ; D51.1 4981.59,3296.59 v1(4995,3310)
  Bottom Layer w10: v1(4935,3420) 4935,3370 v1(4995,3310)
OUTR3: D4.1 D20.1 IC1.2 | length 824.9
  Top Layer w10: D20.1 1741.93,4382.28 1747.76,4376.46 1747.76,4347.24 v1(1970,4125) ; D4.1 1993.43,4182.28 2246.54,3929.17 2268.58,3929.17 IC1.2
  Bottom Layer w10: v1(1970,4125) 2045,4125 v1@2050,4130
  other v1: 2047.5,4127.5
OUTR3_1: D36.1 D52.1 IC2.2 | length 824.9
  Top Layer w10: IC2.2 5001.42,3615.83 5023.46,3615.83 5276.57,3362.72 D36.1 ; v1(5300,3420) 5522.24,3197.76 5522.24,3168.54 5528.07,3162.72 D52.1
  Bottom Layer w10: v1@5220,3415 5225,3420 v1(5300,3420)
  other v1: 5222.5,3417.5
OUTR4: D5.1 D21.1 IC1.40 | length 707
  Top Layer w10: IC1.40 2771.42,3908.58 ; v1(2740,3930) 2750,3930 2771.42,3908.58 ; v1(2765,3995) 2765,3990 2775,3980 3000,3980 3018.95,3998.95 D21.1 ; D5.1 2813.58,3915.62 2806.55,3908.58 2771.42,3908.58
  Bottom Layer w10: v1(2740,3930) 2765,3955 v1(2765,3995)
OUTR4_1: D37.1 D53.1 IC2.40 | length 707
  Top Layer w10: D53.1 4251.05,3546.05 4270,3565 4495,3565 4505,3555 v1(4505,3550) ; D37.1 4456.42,3629.38 4463.45,3636.42 4498.58,3636.42 ; v1(4530,3615) 4520,3615 4498.58,3636.42 ; IC2.40 4498.58,3636.42
  Bottom Layer w10: v1(4505,3550) 4505,3590 v1(4530,3615)
OUTR5: D6.1 D22.1 IC1.46 | length 638.4
  Top Layer w10: IC1.46 2493.9,4038.9 2621.26,4166.26 2621.26,4176.46 2627.09,4182.28 D6.1 ; v1(2720,4255) 2720,4267.4 2834.88,4382.28 D22.1
  Bottom Layer w10: v1(2580,4130) 2595,4130 v1(2720,4255)
OUTR5_1: D38.1 D54.1 IC2.46 | length 638.4
  Top Layer w10: D54.1 4435.12,3162.72 4550,3277.6 v1(4550,3290) ; D38.1 4642.91,3362.72 4648.74,3368.54 4648.74,3378.74 4776.1,3506.1 IC2.46
  Bottom Layer w10: v1(4550,3290) 4675,3415 v1(4690,3415)
OUTR6: D7.1 D23.1 IC1.55 | length 615.1
  Top Layer w10: D23.1 2012.71,4312.29 v1(2110,4215) ; D7.1 2163.43,4182.28 2169.25,4176.46 2169.25,4155.63 2316.65,4008.23 2316.65,3975.59 IC1.55
  Bottom Layer w10: v1(2110,4215) 2200,4125 v1@2200,4120
  other v1: 2200,4122.5
OUTR6_1: D39.1 D55.1 IC2.55 | length 615.1
  Top Layer w10: IC2.55 4953.35,3569.41 4953.35,3536.77 5100.75,3389.37 5100.75,3368.54 5106.57,3362.72 D39.1 ; v1(5160,3330) 5257.29,3232.71 D55.1
  Bottom Layer w10: v1@5070,3425 5070,3420 v1(5160,3330)
  other v1: 5070,3422.5
OUTR7: D8.1 D24.1 IC1.5 | length 650.9
  Top Layer w10: D24.1 1737.01,3967.99 v1(1775,3930) ; v1(1970,3890) 2014.21,3890 2020.79,3896.58 ; D8.1 1993.43,3923.95 2020.79,3896.58 ; IC1.5 2268.7,3870 2047.37,3870 2020.79,3896.58
  Bottom Layer w10: v1(1775,3930) 1930,3930 v1(1970,3890)
OUTR7_1: D40.1 D56.1 IC2.5 | length 650.9
  Top Layer w10: IC2.5 5001.3,3675 5222.63,3675 5249.21,3648.42 ; D40.1@5281.5,3621.05 5276.57,3621.05 5249.21,3648.42 ; v1(5300,3655) 5255.79,3655 5249.21,3648.42 ; v1(5495,3615) 5532.99,3577.01 D56.1
  Bottom Layer w10: v1(5300,3655) 5340,3615 v1(5495,3615)
OUTR8: D9.1 D25.1 IC1.31 | length 765
  Top Layer w10: IC1.31 2828.58,3731.42 2850,3710 2850,3684.73 2837.18,3671.91 2836.39,3671.91 D9.1@2823.43,3658.95 ; D9.1 D9.1@2823.43,3658.95 ; D25.1 3156.57,3651.05 3143.61,3638.09 3142.82,3638.09 3124.25,3619.52 3124.25,3594.25 3105,3575 2907.38,3575 D9.1@2823.43,3658.95
OUTR8_1: D41.1 D57.1 IC2.31 | length 765
  Top Layer w10: D57.1@4108.5,3893.95 4113.43,3893.95 4126.39,3906.91 4127.18,3906.91 4145.75,3925.48 4145.75,3950.75 4165,3970 4362.62,3970 D41.1@4446.57,3886.05 ; D41.1 D41.1@4446.57,3886.05 ; IC2.31 4441.42,3813.58 4420,3835 4420,3860.27 4432.82,3873.09 4433.61,3873.09 D41.1@4446.57,3886.05
OUTR9: D10.1 D26.1 IC1.25 | length 687.4
  Top Layer w10: IC1.25 2494.8,3663.58 2494.8,3632.3 2675,3452.11 2675,3422.46 2667.78,3415.24 2666.99,3415.24 D10.1@2654.03,3402.28 ; D10.1 D10.1@2654.03,3402.28 ; D26.1 2827.73,3205 2840.69,3217.96 2841.48,3217.96 2850,3226.48 2850,3253.52 2773.52,3330 2700,3330 2659.85,3370.15 2659.85,3396.46 D10.1@2654.03,3402.28
OUTR9_1: D42.1 D58.1 IC2.25 | length 687.4
  Top Layer w10: D58.1 4442.27,4340 4429.31,4327.04 4428.52,4327.04 4420,4318.52 4420,4291.48 4496.48,4215 4570,4215 4610.15,4174.85 4610.15,4148.54 D42.1@4615.97,4142.72 ; D42.1 D42.1@4615.97,4142.72 ; IC2.25 4775.2,3881.42 4775.2,3912.7 4595,4092.89 4595,4122.54 4602.22,4129.76 4603.01,4129.76 D42.1@4615.97,4142.72
OUTR10: D11.1 D27.1 IC1.16 | length 599.2
  Top Layer w10: D27.1 2000.63,3205 2013.59,3217.96 2014.38,3217.96 2032.95,3236.53 2032.95,3255.4 2140,3362.45 2140,3401.38 D11.1 2145.83,3402.28 2158.79,3415.24 2159.58,3415.24 2174.79,3430.45 2174.79,3489.79 2316.73,3631.73 IC1.16
OUTR10_1: D43.1 D59.1 IC2.16 | length 599.2
  Top Layer w10: IC2.16 4953.27,3913.27 5095.21,4055.21 5095.21,4114.55 5110.42,4129.76 5111.21,4129.76 5124.17,4142.72 D43.1 5130,4143.62 5130,4182.55 5237.05,4289.6 5237.05,4308.47 5255.61,4327.04 5256.41,4327.04 5269.37,4340 D59.1
OUTR11: D12.1 D28.1 IC1.10 | length 679.1
  Top Layer w10: D28.1 1741.93,3610.47 1772.4,3580 v1(1930,3580) ; v1(1940,3665) 1940.31,3665.31 1988.2,3665.31 D12.1 1993.43,3665.62 2007.6,3679.79 2008.39,3679.79 2020,3691.4 2020,3710.27 2080.52,3770.79 IC1.10
  Bottom Layer w10: v1(1930,3580) 1930,3655 v1(1940,3665)
OUTR11_1: D44.1 D60.1 IC2.10 | length 679.1
  Top Layer w10: IC2.10 5189.48,3774.21 5250,3834.73 5250,3853.6 5261.61,3865.21 5262.4,3865.21 5276.57,3879.38 D44.1 5281.8,3879.69 5329.69,3879.69 v1(5330,3880) ; v1(5340,3965) 5497.6,3965 5528.07,3934.53 D60.1
  Bottom Layer w10: v1(5330,3880) 5340,3890 v1(5340,3965)
OUTR12: D13.1 D29.1 IC1.28 | length 794
  Top Layer w10: IC1.28@2555,3670 2555,3645.86 2560.86,3640 v1(2625,3640) ; v1(2645,3570) 2735,3480 2735,3459.15 2787.76,3406.4 2814.39,3406.4 D13.1 2823.43,3402.28 2840.75,3384.96 2840.75,3381.1 3016.85,3205 D29.1
  Bottom Layer w10: v1(2625,3640) 2625,3590 v1(2645,3570)
OUTR12_1: D45.1 D61.1 IC2.28 | length 794
  Top Layer w10: D61.1 4253.15,4340 4429.25,4163.9 4429.25,4160.04 4446.57,4142.72 D45.1 4455.61,4138.6 4482.24,4138.6 4535,4085.85 4535,4065 v1(4625,3975) ; v1(4645,3905) 4709.14,3905 4715,3899.14 IC2.28@4715,3875
  Bottom Layer w10: v1(4625,3975) 4645,3955 v1(4645,3905)
OUTR13: D14.1 D30.1 IC1.22 | length 556.7
  Top Layer w10: IC1.22 2435,3664.33 2435,3560 2507.43,3487.57 2507.43,3424.29 2498.38,3415.24 2497.59,3415.24 D14.1@2484.63,3402.28 ; D14.1 D14.1@2484.63,3402.28 ; D30.1 2552.03,3205 2564.99,3217.96 2565.78,3217.96 2575,3227.18 2575,3270.95 2490.45,3355.5 2490.45,3396.46 D14.1@2484.63,3402.28
OUTR13_1: D46.1 D62.1 IC2.22 | length 556.7
  Top Layer w10: D62.1 4717.97,4340 4705.01,4327.04 4704.22,4327.04 4695,4317.82 4695,4274.05 4779.55,4189.5 4779.55,4148.54 D46.1@4785.37,4142.72 ; D46.1 D46.1@4785.37,4142.72 ; IC2.22 4835,3880.67 4835,3985 4762.57,4057.43 4762.57,4120.71 4771.62,4129.76 4772.41,4129.76 D46.1@4785.37,4142.72
OUTR14: D15.1 D31.1 IC1.19 | length 517.1
  Top Layer w10: D31.1 2277.23,3210.83 2291.53,3210.83 2305.83,3225.12 2305.83,3402.28 D15.1 2315.23,3402.28 2328.19,3415.24 2328.98,3415.24 2345,3431.26 2345,3533.1 2375.79,3563.89 IC1.19
OUTR14_1: D47.1 D63.1 IC2.19 | length 517.1
  Top Layer w10: IC2.19 4894.21,3981.11 4925,4011.9 4925,4113.74 4941.02,4129.76 4941.81,4129.76 4954.77,4142.72 D47.1 4964.17,4142.72 4964.17,4319.88 4978.47,4334.17 4992.77,4334.17 D63.1
OUTR15: D16.1 D32.1 IC1.13 | length 701
  Top Layer w10: D32.1 1804.92,3240.43 1960.94,3396.46 1982.68,3396.46 D16.1 1993.43,3402.28 2006.39,3415.24 2007.18,3415.24 2025.75,3433.81 2025.75,3495.75 2240.83,3710.83 2268.58,3710.83 IC1.13
OUTR15_1: D48.1 D64.1 IC2.13 | length 701
  Top Layer w10: IC2.13 5001.42,3834.17 5029.17,3834.17 5244.25,4049.25 5244.25,4111.19 5262.82,4129.76 5263.61,4129.76 5276.57,4142.72 D48.1 5287.32,4148.54 5309.06,4148.54 5465.08,4304.57 D64.1
SCLK: IC1.37 IC2.37 P1.2 P2.2 | length 3287
  Top Layer w10: IC1.37 2580.75,3849.76 2684.76,3849.76 v1(2685,3850) ; v1(3350,3410) 3450.47,3410 3465.47,3425 P2.2 P2.2@3515,3425 ; P1.2@3755,4120 P1.2 3804.53,4120 3819.53,4135 v1(3920,4135) ; v1(4585,3695) 4585.24,3695.24 4689.25,3695.24 IC2.37
  Bottom Layer w10: v1(2685,3850) 3045,3850 3145,3750 3145,3620 3350,3415 v1(3350,3410) ; P2.2@3505,3410 3520,3425 3565,3425 3585,3445 3585,4014.14 3590.86,4020 3660,4020 P1.2 ; v1(3920,4135) 3920,4130 4125,3925 4125,3795 4225,3695 v1(4585,3695)
SIN: IC1.36 P2.3 | length 1146.4
  Top Layer w10: IC1.36@2580,3830 2580.16,3829.84 IC1.36 2674.01,3829.84 2675.66,3828.19 2757.34,3828.19 2772.34,3843.19 3253.19,3843.19 v1(3255,3845) ; v1(3270,3700) 3335,3700 P2.3
  Bottom Layer w10: v1(3255,3845) 3270,3830 v1(3270,3700)
SOUT: IC1.7 IC2.36 P1.3 P2.6 | length 3041.1
  Top Layer w10: v1(2135,3820) 2138.69,3820 2155.5,3836.81 2184.03,3836.81 2191,3829.84 IC1.7 ; v1(2820,3815) 2822.61,3817.61 3502.61,3817.61 P2.6 3585,3900 v1(3615,3900) ; P1.3 3925,3855 v1(3995,3855) ; v1(4000,3720) 4590.85,3720 4595.85,3715 4689.33,3715 IC2.36
  Bottom Layer w10: v1@2135,3815 v1(2135,3820) 2135,3835 2155,3855 2505,3855 2545,3815 v1(2820,3815) ; v1(3615,3900) 3641.81,3900 3761.81,4020 P1.3@3770,4020 ; v1(3995,3855) 3995,3728.69 4000,3723.69 v1(4000,3720)
VCC: C3.2 C6.2 IC1.33 IC2.33 P1.5 P2.5 | length 2549.2
  Top Layer w10: IC1.33 3464.21,3770.79 3505,3730 P2.5@3505,3725 ; C6.2 3391.04,3575.06 3391.04,3543.96 v1(3410,3525) ; P2.5 3665,3725 P1.5 P1.5@3765,3825 ; P1.5@3765,3820 3765,3815 3805.79,3774.21 IC2.33 ; 3835,3770 3835,3733.9 C3.2
  Bottom Layer w10: v1(3410,3525) 3410,3625 P2.5 P2.5@3510,3730
pads on no net: D1. D2. D3. D4. D5. D6. D7. D8. D9. D10. D11. D12. D13. D14. D15. D16. D17. D18. D19. D20. D21. D22. D23. D24. D25. D26. D27. D28. D29. D30. D31. D32. D33. D34. D35. D36. D37. D38. D39. D40. D41. D42. D43. D44. D45. D46. D47. D48. D49. D50. D51. D52. D53. D54. D55. D56. D57. D58. D59. D60. D61. D62. D63. D64. P1.9 P2.9

## Polygon pours and split planes (outlines as drawn)
+VIN_1_1 on Bottom Layer "Bottom Layer-+VIN_1" (solid, pour order 12): 4300,3460 4300,4220 4430,4220 4430,3460
+VIN_1 on Bottom Layer "Bottom Layer-+VIN_1" (solid, pour order 8): 2970,4085 2970,3325 2840,3325 2840,4085
GND on Bottom Layer "Bottom Layer-GND" (solid, pour order 20): 5020,3860 4635,3860 4635,3540 5020,3540
+VIN_1_1 on Bottom Layer "Bottom Layer-+VIN_1 1" (solid, pour order 14): 5360,3270 5360,4220 5145,4220 5145,3270
+VIN_1_1 on Bottom Layer "Bottom Layer-+VIN_1 3" (solid, pour order 18): 5145,3270 4300,3270 4300,3460 5145,3460
+VIN_1_1 on Bottom Layer "Bottom Layer-+VIN_1 2" (solid, pour order 16): 4430,4220 5145,4220 5145,4120 4430,4120
GND on Bottom Layer "Bottom Layer-GND" (solid, pour order 0): 2600,3955 2215,3955 2215,3635 2600,3635
+VIN_1 on Bottom Layer "Bottom Layer-+VIN_1 1" (solid, pour order 2): 1910,4275 1910,3325 2125,3325 2125,4275
+VIN_1 on Bottom Layer "Bottom Layer-+VIN_1 2" (solid, pour order 10): 2840,3325 2125,3325 2125,3425 2840,3425
no net on Bottom Layer "Bottom Layer-No Net" (solid, pour order 6): 2915,4085
+VIN_1 on Bottom Layer "Bottom Layer-+VIN_1 3" (solid, pour order 4): 2125,4275 2970,4275 2970,4085 2125,4085
+VIN_2_1 on Top Layer (solid, pour order 22): 4040,4375 4045,4380 4230,4380 4230,3090 4045,3090
+VIN_2 on Top Layer (solid, pour order 44): 3230,3170 3225,3165 3040,3165 3040,4455 3225,4455
+VIN_2 on Top Layer (solid, pour order 42): 3040,3165 1680,3165 1680,3315 3040,3315
+VIN_2 on Top Layer (solid, pour order 40): 1680,3315 1680,4455 1830,4455 1835,4455 1835,3315
+VIN_2 on Top Layer (solid, pour order 38): 1835,4455 3040,4455 3040,4300 1835,4300
+VIN_2_1 on Top Layer (solid, pour order 28): 5435,3090 4230,3090 4230,3245 5435,3245
+VIN_2_1 on Top Layer (solid, pour order 26): 5590,4230 5590,3090 5440,3090 5435,3090 5435,4230
+VIN_2_1 on Top Layer (solid, pour order 24): 4230,4380 5590,4380 5590,4230 4230,4230